# Altium PCB PCB1.PcbDoc
Units mm, origin at the board's own origin, x right, y up, seen from the top; angles counter-clockwise.
Board outline 36 x 36 mm, 2 copper layers (Top Layer, Bottom Layer); 55 components, 28 nets, 182 pads, 0 vias.
Unrouted connection lines stored in the file: 120.
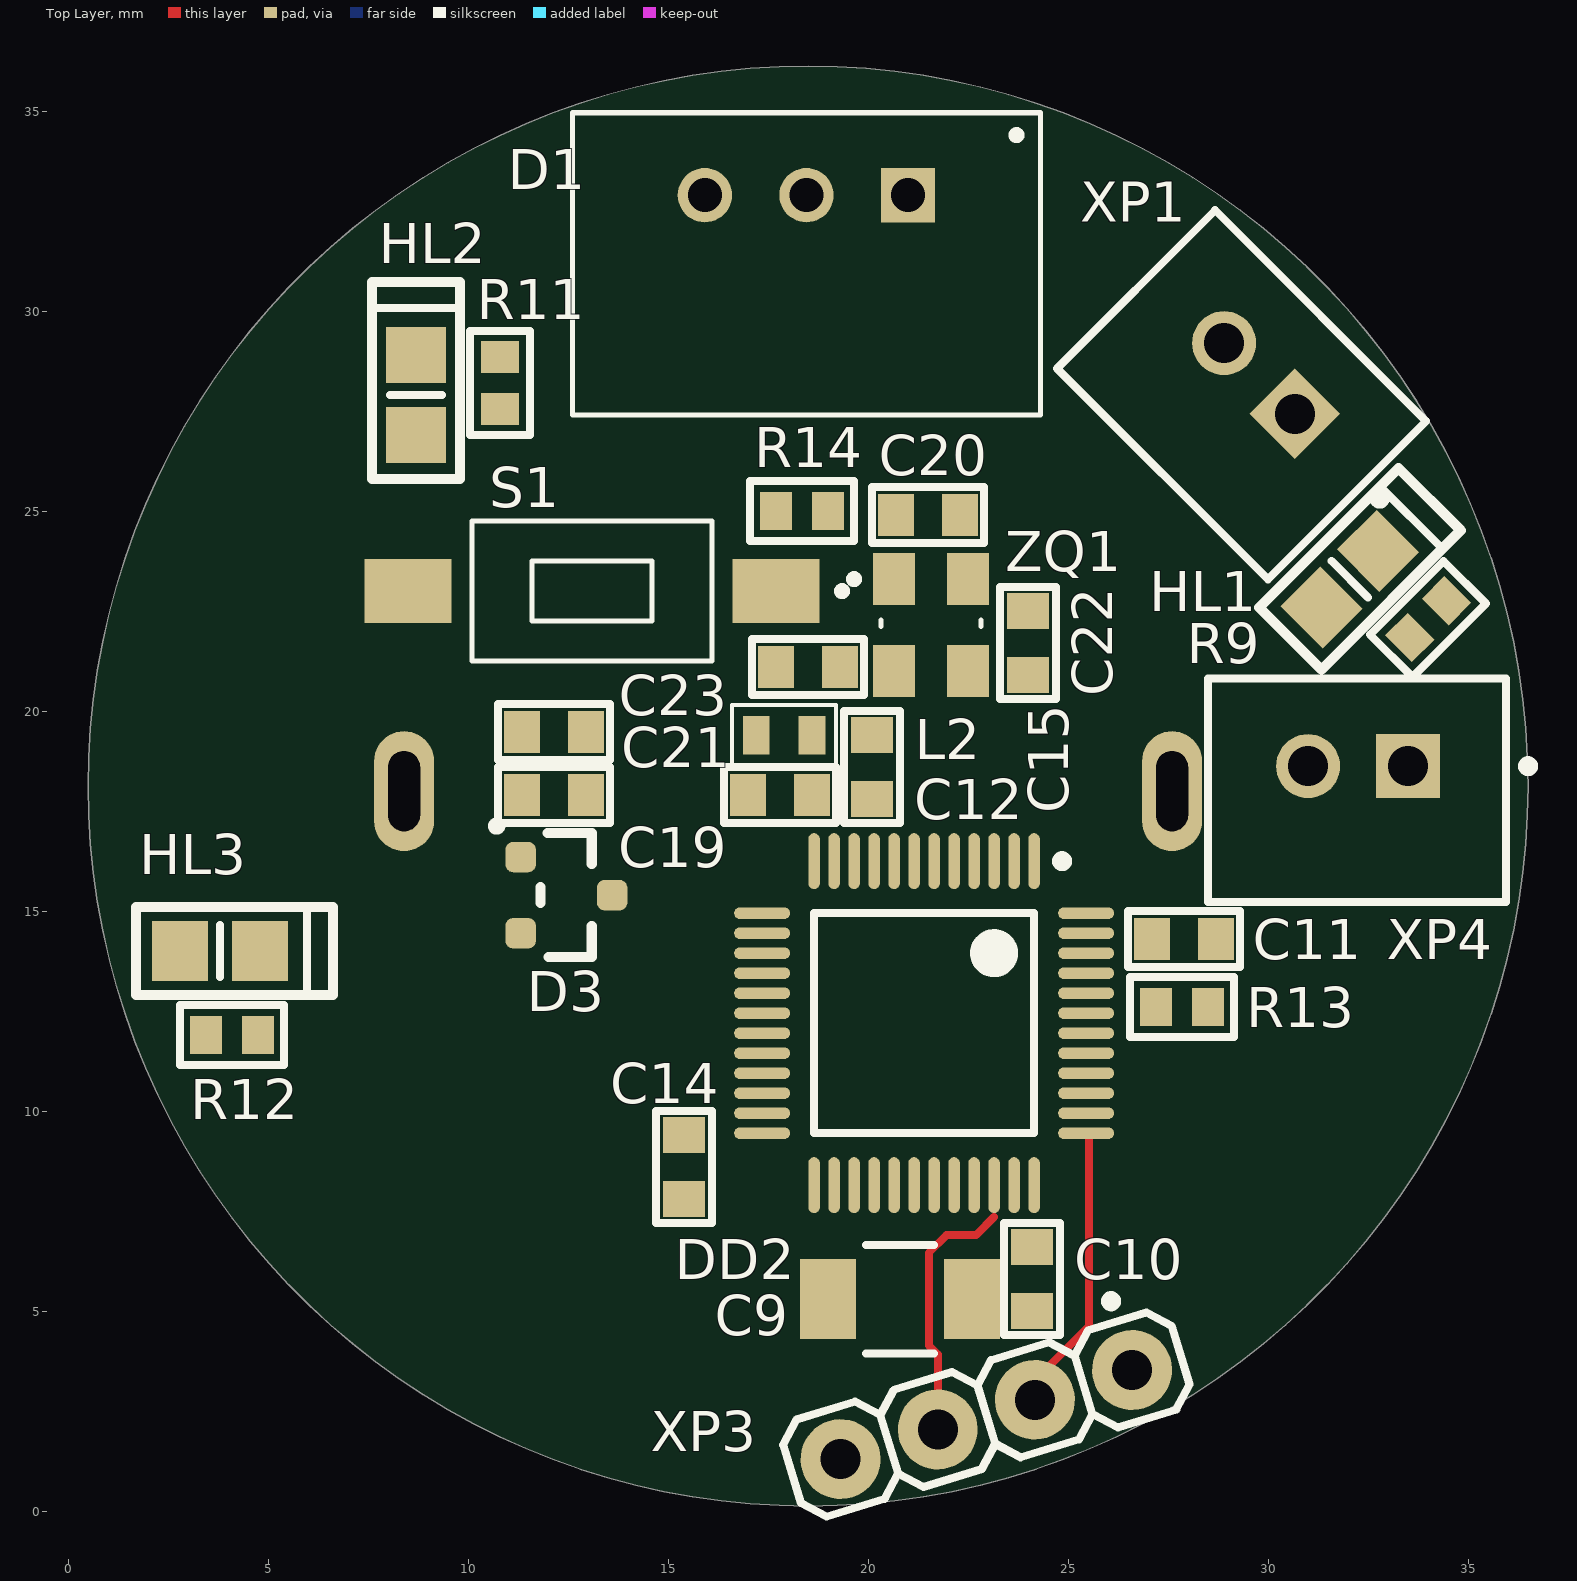
[diagram p0: Top Layer view]
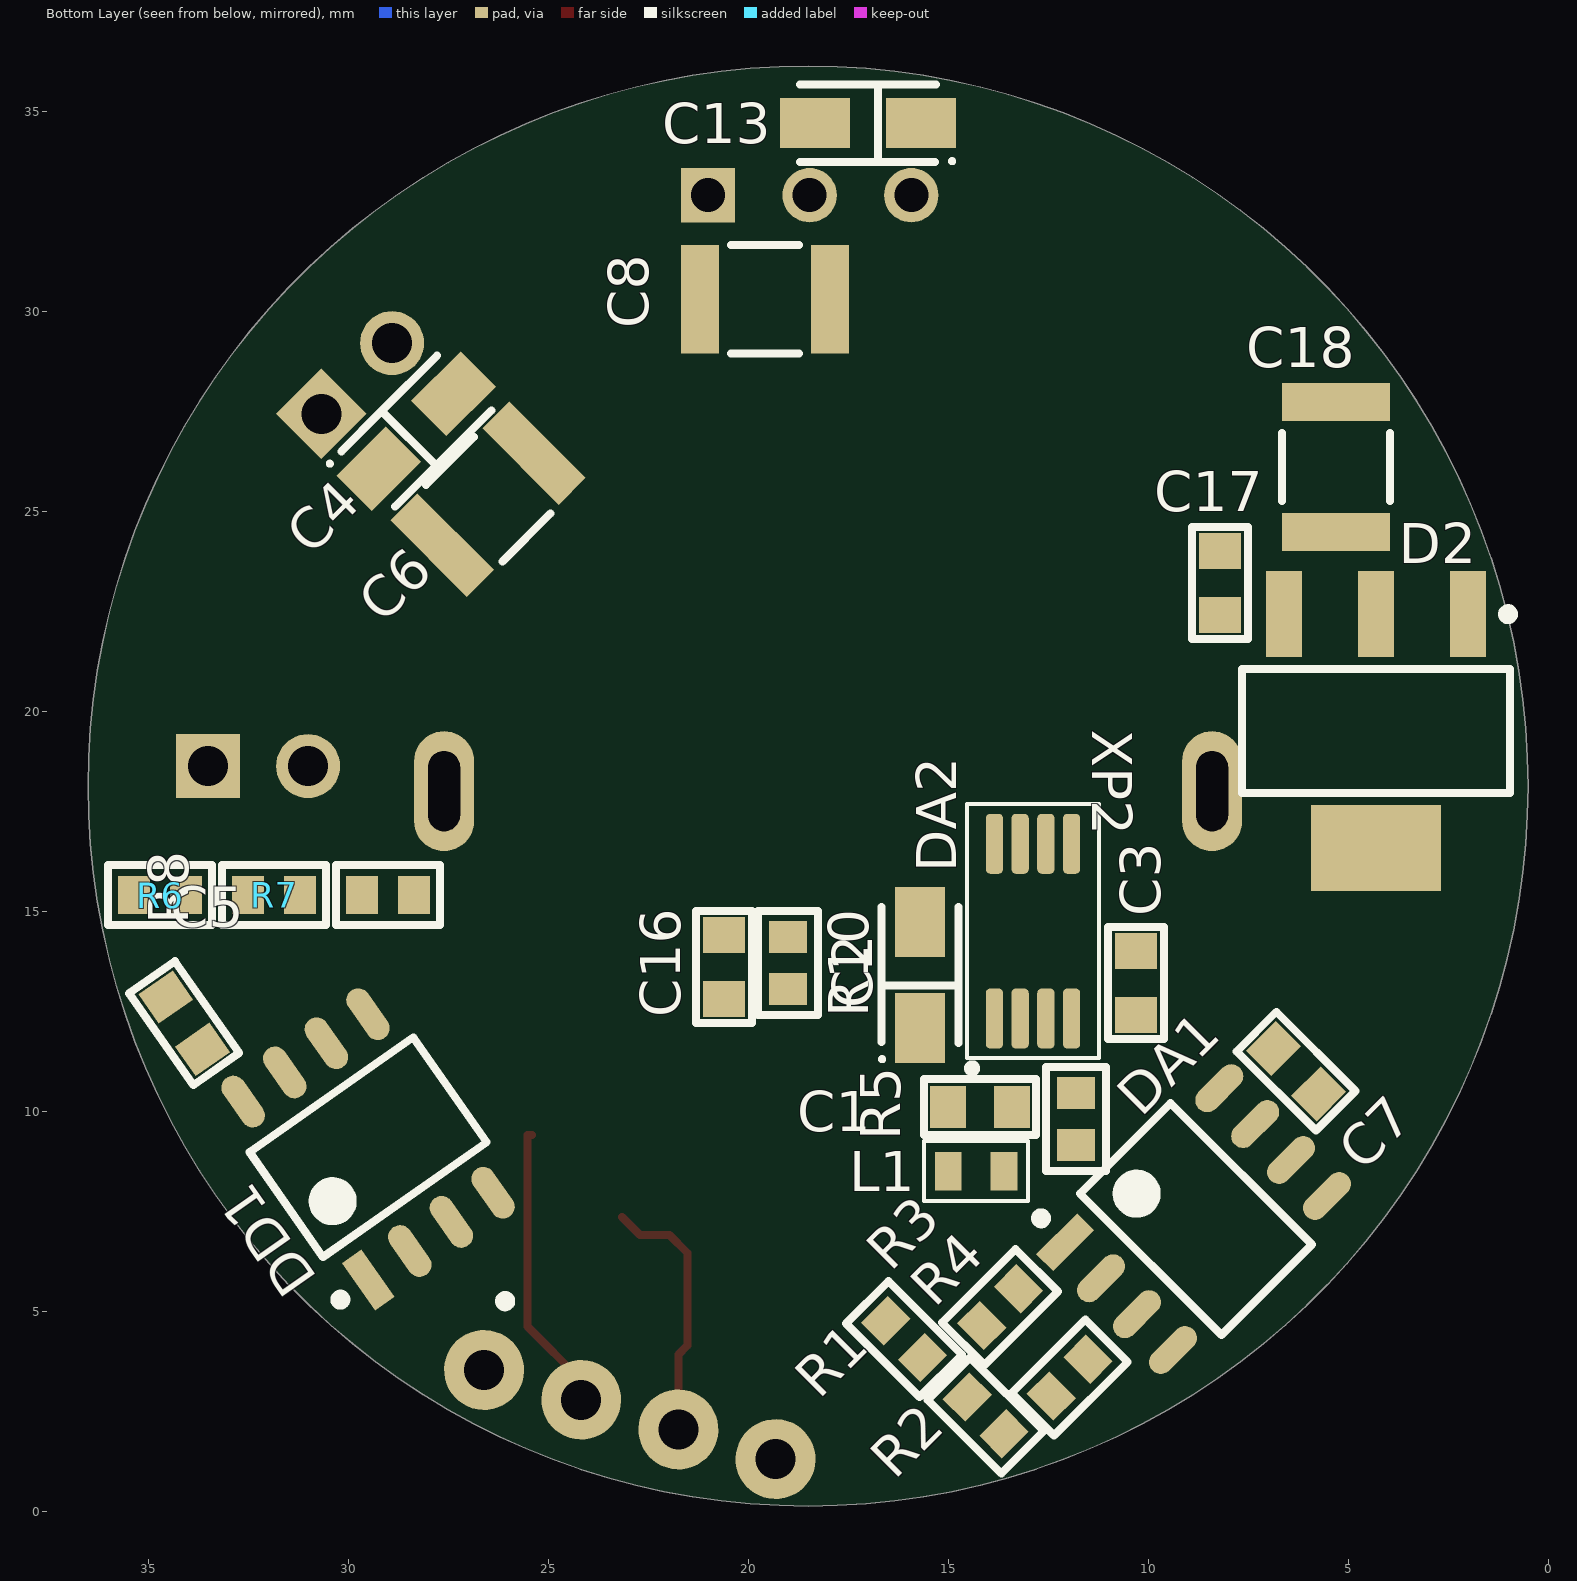
[diagram p1: Bottom Layer view, seen from below]

## Layer stack, top to bottom
Top Solder: solder mask 0.0102, Solder Resist, Dk 3.5
Top Layer: signal copper 0.0356
Dielectric 1: dielectric 0.32, FR-4, Dk 4.8
Bottom Layer: signal copper 0.0356
Bottom Solder: solder mask 0.0102, Solder Resist, Dk 3.5

## Board outline
0.5,18.127 ccw(c18.5,18.127) 18.5,0.127 ccw(c18.5,18.127) 36.5,18.127 ccw(c18.5,18.127) 18.5,36.127 ccw(c18.5,18.127)

## Design rules (kind name [scope] priority, off if disabled: settings)
Clearance [All] p1: gap=0.254 ignorepadtopadclearanceinfootprint=FALSE
DiffPairsRouting [All] p1: maxlimit=0.254 minlimit=0.254 mostfreqgap=0.254 toplayer_minwidth=0.381 toplayer_maxwidth=0.381 toplayer_prefwidth=0.381 bottomlayer_minwidth=0.381 bottomlayer_maxwidth=0.381 bottomlayer_prefwidth=0.381 maxuncoupledlength=12.7
PolygonConnect [All] p1: connectstyle=Relief reliefconductorwidth=0.254 reliefentries=4 polygonreliefangle="90 Angle" airgapwidth=0.254
RoutingVias [All] p1: holewidth=0.711 width=1.27 viastyle="Through Hole" minholewidth=0.711 minwidth=1.27 maxholewidth=0.711 maxwidth=1.27
SolderMaskExpansion [All] p1: expansion=0.102 istentingtop=FALSE
SupplyNets "Schematic Supply Nets_4" [InNet('GND')] p1: voltage=0.000
SupplyNets "Schematic Supply Nets_3" [InNet('24V')] p2: voltage=0.000
SupplyNets "Schematic Supply Nets_2" [InNet('5V')] p3: voltage=0.000
SupplyNets "Schematic Supply Nets_1" [InNet('3.3RV')] p4: voltage=0.000
SupplyNets "Schematic Supply Nets" [InNet('3.3V')] p5: voltage=0.000
Width [All] p1: maxlimit=0.254 minlimit=0.254 preferedwidth=0.254
29 further rules are at their usual default settings.

## Classes and differential pairs
differential pair RS485: +RS485_P -RS485_N

## Components (designator, comment, footprint, x,y, rotation, side; value= is the part's Value field where it differs from the comment)
C1 "Capacitor" 0603C 14.2,10.1 r0 bottom value="0,1 мк"
C2 "Capacitor" TC_A 15.7,13.4 r90 bottom value="10 мк"
C3 "Capacitor" 0603C 10.3,13.2 r270 bottom value="0,1 мк"
C4 "Capacitor" TC_A 28.3,27 r135 bottom value="100 мк"
C5 "Capacitor" 0603C 34.1,12.2 r235 bottom value="0,1 мк"
C6 "Capacitor" 1210C 26.5,25.3 r315 bottom value="10 мк"
C7 "Capacitor" 0603C 6.3,11 r45 bottom value="0,1 мк"
C8 "Capacitor" 1210C 19.575,30.3 r0 bottom value="10 мк"
C9 "Capacitor" 1206C 20.8,5.3 r0 top value="4,7 мк"
C10 "Capacitor" 0603C 24.1,5.8 r90 top value="0,1 мк"
C11 "Capacitor" 0603C 27.9,14.3 r180 top value="0,1 мк"
C12 "Capacitor" 0603C 17.8,17.9 r0 top value="1 мк"
C13 "Capacitor" TC_A 17,34.7 r0 bottom value="22 мк"
C14 "Capacitor" 0603C 15.4,8.6 r90 top value="0,1 мк"
C15 "Capacitor" 0603C 20.1,18.6 r270 top value="10 н"
C16 "Capacitor" 0603C 20.6,13.6 r90 bottom value="0,1 мк"
C17 "Capacitor" 0603C 8.2,23.2 r270 bottom value="0,1 мк"
C18 "Capacitor" 1210C 5.3,26.1 r270 bottom value="10 мк"
C19 "Capacitor" 0603C 12.15,17.9 r180 top value="1 мк"
C20 "Capacitor" 0603C 21.5,24.9 r0 top value="22 п"
C21 "Capacitor" 0603C 12.15,19.475 r180 top value="0,1 мк"
C22 "Capacitor" 0603C 24,21.7 r270 top value="22 п"
C23 "Capacitor" 0603C 18.5,21.1 r0 top value="0,1 мк"
D1 "TSR 1-2450" SIP3 18.46,31.15 r180 top
D2 "LD1117S33CTR" SOT223 4.3,19.5 r270 bottom
D3 "REF3033AIDBZR" SOT23-3 11.314,16.352 r0 top
DA1 "AD8602ARZ-REEL7" SOIC-8 8.8,7.3 r135 bottom
DA2 "AD7680ARMZ" MSOP-8 12.877,14.5 r90 bottom
DD1 "MAX485CSA" SOIC-8 29.5,9.1 r55 bottom
DD2 "STM32F103C8T6" LQFP48 21.4,12.2 r270 top
HL1 "LED" 0805D 31.9,23.3 r45 top
HL2 "LED" 0805D 8.6,27.8 r90 top
HL3 "LED" 0805D 3.7,14.1 r0 top
L1 "Ferrite Bead" 0603L 14.3,8.5 r0 bottom
L2 "Ferrite Bead" 0603L 17.9,19.4 r0 top
R1 "Resistor" 0603R 16.1,4.3 r45 bottom value="20 к"
R2 "Resistor" 0603R 14.06,2.392 r45 bottom value="6,2 к"
R3 "Resistor" 0603R 13.7,5.1 r135 bottom value="5,1 к"
R4 "Resistor" 0603R 11.96,3.34 r315 bottom value=100
R5 "Resistor" 0603R 11.8,9.8 r90 bottom value="10 к"
R6 "Resistor" 0603R 34.7,15.4 r0 bottom value=680
R7 "Resistor" 0603R 31.85,15.4 r0 bottom value=120
R8 "Resistor" 0603R 29,15.4 r0 bottom value=680
R9 "Resistor" 0603R 34,22.3 r225 top value="1,0 к"
R10 "Resistor" 0603R 19,13.7 r90 bottom value="10 к"
R11 "Resistor" 0603R 10.8,28.2 r270 top value="1,0 к"
R12 "Resistor" 0603R 4.1,11.9 r180 top value="1,0 к"
R13 "Resistor" 0603R 27.85,12.6 r0 top value="10 к"
R14 "Resistor" 0603R 18.35,25 r180 top value="10 к"
S1 "Tact_button" Button_SMD_10mm 13.1,23 r180 top
XP1 "CWF-2" CWF-2 28.882,29.182 r315 top
XP2 "WIKA" WIKA_PCB 18,18 r180 bottom
XP3 "PLS-4" PLS4 26.6,3.528 r287 top
XP4 "CWF-2" CWF-2 31,18.6 r0 top
ZQ1 "XTAL_GND" QSMD3.2x2.5 20.65,23.3 r0 top value="8 МГц"

## Footprints (in the part's own frame and the unit in brackets; to place one, negate y for a bottom-side part, rotate by r counter-clockwise, add the part's x,y. Pads: shape width x height; smd on the part's side, far side on the other; paste and mask are expansions set on the pad)
0603C [mm] "Chip Resistor, 2-Leads, Body 1,40x0,80mm, IPC Medium Density"
  rect 0.9x1.05 smd: 1(-0.8,0) 2(0.8,0)
  silkscreen extent -1.4,-0.7 1.4,0.7, body extent -0.85,-0.45 0.85,0.45, height 0.9
0603L [mm] "Chip Inductor, 2-Leads, Body 1,55x0,85mm, IPC Medium Density"
  rect 0.67x0.97 smd: 1(-0.695,0) 2(0.695,0)
  silkscreen extent -1.3,-0.75 1.3,0.75, body extent -0.8,-0.45 0.8,0.45, height 0.45
0603R [mm] "Chip Resistor, 2-Leads, Body 1.60x0.85mm, IPC Medium Density"
  rect 0.8x0.95 smd: 1(-0.65,0) 2(0.65,0)
  silkscreen extent -1.3,-0.75 1.3,0.75, body extent -0.87,-0.47 0.88,0.48, height 0.9
0805D [mm]
  rect 1.4x1.5 smd: 1(-0.9,-0.1) 2(1.1,-0.1)
  silkscreen extent -2,-1.2 2.93,1, body extent -0.98,-0.8 1.18,0.6, height 0.7
1206C [mm]
  rect 1.4x2 smd paste+0 mask+0: 1(-1.8,0) 2(1.8,0)
  silkscreen extent -0.85,-1.35 0.85,1.35, body extent -1.6,-0.74 1.6,0.86, height 1.59
1210C [mm]
  rect 0.954x2.706 smd paste+0 mask+0: 1(-1.625,0) 2(1.625,0)
  silkscreen extent -0.85,-1.35 0.85,1.35, body extent -1.6,-1.25 1.6,1.25, height 2.7
Button_SMD_10mm [mm]
  rect 2.18x1.6 smd: 1(-4.6,0) 2(4.6,0)
  silkscreen extent -6.35,-1.75 3,1.75, body extent -3.4,-1.75 3.4,1.75, height 5.2
CWF-2 [mm]
  rect 1.6x1.6 hole 1 paste-2539.97 mask+0: 1(2.5,0.025)
  round 1.6 hole 1 paste-2539.97 mask+0: 2(0,0.025)
  silkscreen extent -2.51,-3.37 5.62,2.22, body extent -2.5,-3.53 5,2.23, height 7
LQFP48 [mm] "TSQFP, 48-Leads, Body 7,00x7,00mm, Pitch 0,50mm, IPC Medium Density"
  oval 1.4x0.29 smd: 1(-4.05,2.75) 2(-4.05,2.25) 3(-4.05,1.75) 4(-4.05,1.25) 5(-4.05,0.75) 6(-4.05,0.25) 7(-4.05,-0.25) 8(-4.05,-0.75) 9(-4.05,-1.25) 10(-4.05,-1.75) 11(-4.05,-2.25) 12(-4.05,-2.75)
  oval 0.29x1.4 smd paste+0 mask+0.09: 13(-2.75,-4.05) 14(-2.25,-4.05) 15(-1.75,-4.05) 16(-1.25,-4.05) 17(-0.75,-4.05) 18(-0.25,-4.05) 19(0.25,-4.05) 20(0.75,-4.05) 21(1.25,-4.05) 22(1.75,-4.05) 23(2.25,-4.05) 24(2.75,-4.05) 37(2.75,4.05) 38(2.25,4.05) 39(1.75,4.05) 40(1.25,4.05) 41(0.75,4.05) 42(0.25,4.05) 43(-0.25,4.05) 44(-0.75,4.05) 45(-1.25,4.05) 46(-1.75,4.05) 47(-2.25,4.05) 48(-2.75,4.05)
  oval 1.4x0.29 smd paste+0 mask+0.09: 25(4.05,-2.75) 26(4.05,-2.25) 27(4.05,-1.75) 28(4.05,-1.25) 29(4.05,-0.75) 30(4.05,-0.25) 31(4.05,0.25) 32(4.05,0.75) 33(4.05,1.25) 34(4.05,1.75) 35(4.05,2.25) 36(4.05,2.75)
  silkscreen extent -4.17,-2.75 2.75,3.58, body extent -4.5,-4.47 4.5,4.52, height 1.48
MSOP-8 [mil]
  rrect50% 59x17 smd: 1(-86,38) 2(-86,12.67) 3(-86,-12.67) 4(-86,-38) 5(86,-38) 6(86,-12.67) 7(86,12.67) 8(86,38)
  silkscreen extent -139,-65 125,65, body extent -96,-59 96,59, height 43
PLS4 [mm]
  round 2 hole 1: 1(0,0) 2(0,-2.54) 3(0,-5.08) 4(0,-7.62)
  silkscreen extent -1.92,-8.89 1.27,1.27, body extent -1.27,-8.89 1.27,1.27, height 8.44
QSMD3.2x2.5 [mm] "Кварцевый резонатор"
  rect 1.05x1.3 smd: 1(0,0) 2(1.85,-2.3) 3(0,-2.3) 3(1.85,0)
  silkscreen extent -1.1,-1.18 2.18,0.1, body extent -0.33,-2.75 2.17,0.45, height 0.8
SIP3 [mm]
  rect 1.358x1.358 / inner round 1.358 / far side rect 1.358x1.358 hole 0.85: 1(-2.54,-1.75)
  round 1.358 hole 0.85: 2(0,-1.75) 3(2.54,-1.75)
  silkscreen extent -5.85,-3.81 5.85,3.75, body extent -5.85,-3.75 5.85,3.75, height 10.15
SOIC-8 [mm] "for operational amplifier"
  rect 1.45x0.6 smd: 1(-2.725,1.905)
  oval 1.45x0.6 smd: 2(-2.725,0.635) 3(-2.725,-0.635) 4(-2.725,-1.905) 5(2.725,-1.905) 6(2.725,-0.635) 7(2.725,0.635) 8(2.725,1.905)
  silkscreen extent -2.85,-2.5 1.6,2.88, body extent -3,-2.5 3,2.5, height 1.75
SOT23-3 [mil]
  rrect50% 30x30 smd: 1(0,0) 2(0,-75) 3(90,-37.5)
  silkscreen extent -27,-98 70,34, body extent -4,-97 94,21, height 41
SOT223 [mm] "SOT223, ld1117"
  rect 2.15x0.9 smd: 1(-2.925,2.3) 2(-2.925,0) 3(-2.925,-2.3)
  rect 2.15x3.25 smd: 2(2.925,0)
  silkscreen extent -3.05,-3.35 1.55,3.42, body extent -3.56,-3.3 3.51,3.2, height 1.6
TC_A [mm] "Tantalum capacitor, type A,  1 pin - plus"
  rect 1.75x1.25 smd: 1(-1.325,0) 2(1.325,0)
  silkscreen extent -2.15,-0.97 1.7,1, body extent -1.73,-0.8 1.73,0.8, height 1.64
WIKA_PCB [mm]
  oval 1.5x3 hole 0.8 slot 2 at 90 deg: 1(-9.6,0) 2(9.6,0)
  body extent -9.96,-3.45 9.96,3.45, height 10.5

## Part data
C1 C3 C5 C7 C10 C11 C14 C16 C17 C21 C23: library part Capacitor_0,1u_10_50V_X7R_0603C, "Конденсатор", Capacity (nF)=100, Dielectric=X7R, Tolerance=0,1, Voltage (V)=50, Library Path2=Schematic\Capacitor.SchLib, Part Number=Capacitor_0,1u_10_50V_X7R_0603C
C2: library part Capacitor_10u_10_50V_TC_A, "Танталовый конденсатор", Capacity (uF)=10, Tolerance=0,1, Voltage (V)=50, Part Number=Capacitor_10u_10_50V_TC_A, Type=Tantalum
C4: library part Capacitor_100u_10_50V_TC_A, "Танталовый конденсатор", Capacity (uF)=100, Tolerance=0,1, Voltage (V)=50, Part Number=Capacitor_100u_10_50V_TC_A, Type=Tantalum
C6 C8 C18: library part Capacitor_10u_10_35V_X7R_1210C, "Конденсатор", Capacity (nF)=10000, Dielectric=X7R, Tolerance=0,1, Voltage (V)=35, Library Path2=Schematic\Capacitor.SchLib, Part Number=Capacitor_10u_10_35V_X7R_1210C
C9: library part Capacitor_4,7u_10_50V_X7R_1206C, "Конденсатор", Capacity (nF)=4700, Dielectric=X7R, Tolerance=0,1, Voltage (V)=50, Library Path2=Schematic\Capacitor.SchLib, Part Number=Capacitor_4,7u_10_50V_X7R_1206C
C12 C19: library part Capacitor_1u_10_50V_X7R_0603C, "Конденсатор", Capacity (nF)=1000, Dielectric=X7R, Tolerance=0,1, Voltage (V)=50, Library Path2=Schematic\Capacitor.SchLib, Part Number=Capacitor_1u_10_50V_X7R_0603C
C13: library part Capacitor_22u_10_50V_TC_A, "Танталовый конденсатор", Capacity (uF)=22, Tolerance=0,1, Voltage (V)=50, Part Number=Capacitor_22u_10_50V_TC_A, Type=Tantalum
C15: library part Capacitor_10n_10_50V_X7R_0603C, "Конденсатор", Capacity (nF)=10, Dielectric=X7R, Tolerance=0,1, Voltage (V)=50, Library Path2=Schematic\Capacitor.SchLib, Part Number=Capacitor_10n_10_50V_X7R_0603C
C20 C22: library part Capacitor_22p_5_50V_X7R_0603C, "Конденсатор", Capacity (nF)=0,022, Dielectric=X7R, Tolerance=0,05, Voltage (V)=50, Library Path2=Schematic\Capacitor.SchLib, Part Number=Capacitor_22p_5_50V_X7R_0603C
D1: "DC/DC преобразователь, 5Вт, вход 6.5-36В, выход 5В/ 1А", Part Number="TSR 1-2450"
D2: "Линейный стабилизатор напряжения", Part Number=LD1117S33CTR
D3: "Источник опорного напряжения, 3.3 В", Part Number=REF3033AIDBZR
DA1: "2-х канальный прецизионный, широкополосный операционный усилитель с однополярным питанием", Part Number=AD8602ARZ-REEL7
DA2: "16-бит АЦП, SAR, 100Квыборок/с", Part Number=AD7680ARMZ
DD1: "RS-485 приёмопередатчик", Part Number=MAX485CSA
DD2: "Микроконтроллер", Case=корпус, Manufacturer="ST Microelectronics", Value1=MCU, Datasheet=http://www.st.com/content/ccc/resource/technical/document/datasheet/33/d4/6f/1d/df/0b/4c/6d/CD00161566.pdf/files/CD00161566.pdf/jcr:content/translations/en.CD00161566.pdf, Notice="48 пиновая версия STM32F103", Part Number=STM32F103C8T6, Rate=-0,3...4,0В, Shop="магазин с самой дешевой ценой"
HL1: "Светодиод", Color=Red, Part Number=LED
HL2: "Светодиод", Color=Yellow, Part Number=LED
HL3: "Светодиод", Color=Green, Part Number=LED
L1 L2: library part Inductance, "BLM18AG121SZ1D Ferrite Beads Multi-Layer 120Ohm 25% 100MHz 0.8A 0.18Ohm DCR 0603 Automotive T/R Бусина ферритовая чип, габарит 0603, импеданс 120R, максимальный постоянный ток 800MA, активное сопротивление 0R18", Part Number=Inductance
R1: library part Resistor_20k_1_0603, "Резистор номиналом 20 кОм и точностью 1%", Tolerance=1%, Part Number=Resistor_20k_1_0603
R2: library part Resistor_6.2k_1_0603, "Резистор номиналом 6,2 кОм и точностью 1%", Tolerance=1%, Part Number=Resistor_6.2k_1_0603
R3: library part Resistor_5.1k_1_0603, "Резистор номиналом 5,1 кОм и точностью 1%", Tolerance=1%, Part Number=Resistor_5.1k_1_0603
R4: library part Resistor_100_1_0603, "Резистор номиналом 100 Ом и точностью 1%", Tolerance=1%, Part Number=Resistor_100_1_0603
R5 R10 R13 R14: library part Resistor_10k_1_0603, "Резистор номиналом 10 кОм и точностью 1%", Tolerance=1%, Part Number=Resistor_10k_1_0603
R6 R8: library part Resistor_680_1_0603, "Резистор номиналом 680 Ом и точностью 1%", Tolerance=1%, Part Number=Resistor_680_1_0603
R7: library part Resistor_120_1_0603, "Резистор номиналом 120 Ом и точностью 1%", Tolerance=1%, Part Number=Resistor_120_1_0603
R9 R11 R12: library part Resistor_1.0k_1_0603, "Резистор номиналом 1,0 кОм и точностью 1%", Tolerance=1%, Part Number=Resistor_1.0k_1_0603
S1: "Тактовая кнопка", Part Number=Tact_button
XP1: "2-пиновый разъем с ключом", Value1=+24V, Value2=GND, Datasheet=https://static.chipdip.ru/lib/413/DOC001413777.pdf, Part Number=CWF-2, System=Connector
XP3: "Гребенка 4 пина", Value1={Value1}, Value2={Value2}, Value3={Value3}, Value4={Value4}, Part Number=PLS-4, System=Connector
XP4: "2-пиновый разъем с ключом", Value1=RS485_B, Value2=RS485_A, Datasheet=https://static.chipdip.ru/lib/413/DOC001413777.pdf, Part Number=CWF-2, System=Connector
ZQ1: "Кварцевый резонатор с входом земли", Part Number=XTAL_GND
XP2: Part Number=WIKA

## Nets (pads, with @x,y where several pads share a name; then routed paths per layer and width w, separated by ;. In a path a pad name is that pad's centre, name@x,y a point inside that pad or via, vN(x,y) a via of type N, cw(c..) or ccw(c..) an arc to the next point about the centre after c; other vN are vias at no path point)
3.3RV: D3.2 L1.1
3.3V: C5.2 C7.2 C9.2 C10.2 C11.2 C14.2 C18.2 D2.2 DA1.8 DD1.8 DD2.24 DD2.36 DD2.48 HL3.1 L2.1 R1.2 R8.1 R14.1 XP3.1
4-20uA: DA1.3 R4.1 XP2.2
5V: C13.1 C17.2 C19.2 C21.2 D1.3 D2.3 D3.1 HL2.1
24V: C4.1 C6.2 C8.2 D1.1 HL1.1 XP1.1 XP2.1
ADC1_IN: DA1.1 R3.2 R5.1 R10.1
BOOT0: DD2.44 R13.1
GND: C1.1 C2.2 C3.1 C4.2 C5.1 C6.1 C7.1 C8.1 C9.1 C10.1 C11.1 C12.1 C13.2 C14.1 C15.1 C16.1 C17.1 C18.1 C19.1 C20.2 C21.1 C22.1 C23.2 D1.2 D2.1 D3.3 DA1.4 DA2.2 DA2.3 DA2.8 DD1.5 DD2.8 DD2.23 DD2.35 DD2.47 R2.1 R4.2 R6.2 R9.2 R11.2 R12.2 R13.2 S1.2 XP1.2 XP3.4 ZQ1.3
NetC1_2: C1.2 C2.1 DA2.1 L1.2
NetC3_2: C3.2 DA2.4 R5.2
NetC12_2: C12.2 C15.2 DD2.9 L2.2
NetC16_2: C16.2 DD2.10 R10.2
NetDA1_2: DA1.2 R1.1 R2.2 R3.1
NetHL1_2: HL1.2 R9.1
NetHL2_2: HL2.2 R11.1
NetHL3_2: HL3.2 R12.1
OSCin: C22.2 DD2.5 ZQ1.2
OSCout: C20.1 DD2.6 ZQ1.1
RESET: C23.1 DD2.7 R14.2 S1.1
RS485_N: DD1.7 R6.1 R7.2 XP4.1
RS485_P: DD1.6 R7.1 R8.2 XP4.2
SPI1_MISO: DA2.7 DD2.16
SPI1_SCK: DA2.5 DD2.15
SWCLOCK: DD2.37 XP3.2 | length 7.3
  Top Layer w0.2: XP3.2 24.171,3.271 25.517,4.617 25.517,9.408 DD2.37@25.4,9.408
SWDIO: DD2.34 XP3.3 | length 6.5
  Top Layer w0.2: XP3.3 21.742,3.919 21.519,4.142 21.519,6.458 21.966,6.904 22.703,6.904 23.15,7.351
USART1_DE: DD1.2 DD1.3 DD2.29
USART1_RX: DD1.1 DD2.31
USART1_TX: DD1.4 DD2.30
pads on no net: DA1.5 DA1.6 DA1.7 DA2.6 DD2.1 DD2.2 DD2.3 DD2.4 DD2.11 DD2.12 DD2.13 DD2.14 DD2.17 DD2.18 DD2.19 DD2.20 DD2.21 DD2.22 DD2.25 DD2.26 DD2.27 DD2.28 DD2.32 DD2.33 DD2.38 DD2.39 DD2.40 DD2.41 DD2.42 DD2.43 DD2.45 DD2.46

## Silkscreen, mask and mechanical layers (free items; w line width, h text height)
Mechanical 1:
  circle w0.254: c18.5,18.127 r18